# Altium PCB FPGA.PcbDoc (part 2 of 2)
Units mil, origin at the board's own origin, x right, y up, seen from the top; angles counter-clockwise.
Board outline 3947.01 x 3159.61 mil, 4 copper layers (Top Layer, Top, Mid-Layer 1, GND, Mid-Layer 2, VCC, Bottom Layer, Bottom), stack 18.2 mil thick; 141 components, 123 nets, 692 pads, 263 vias.
Unrouted connection lines stored in the file: 24.
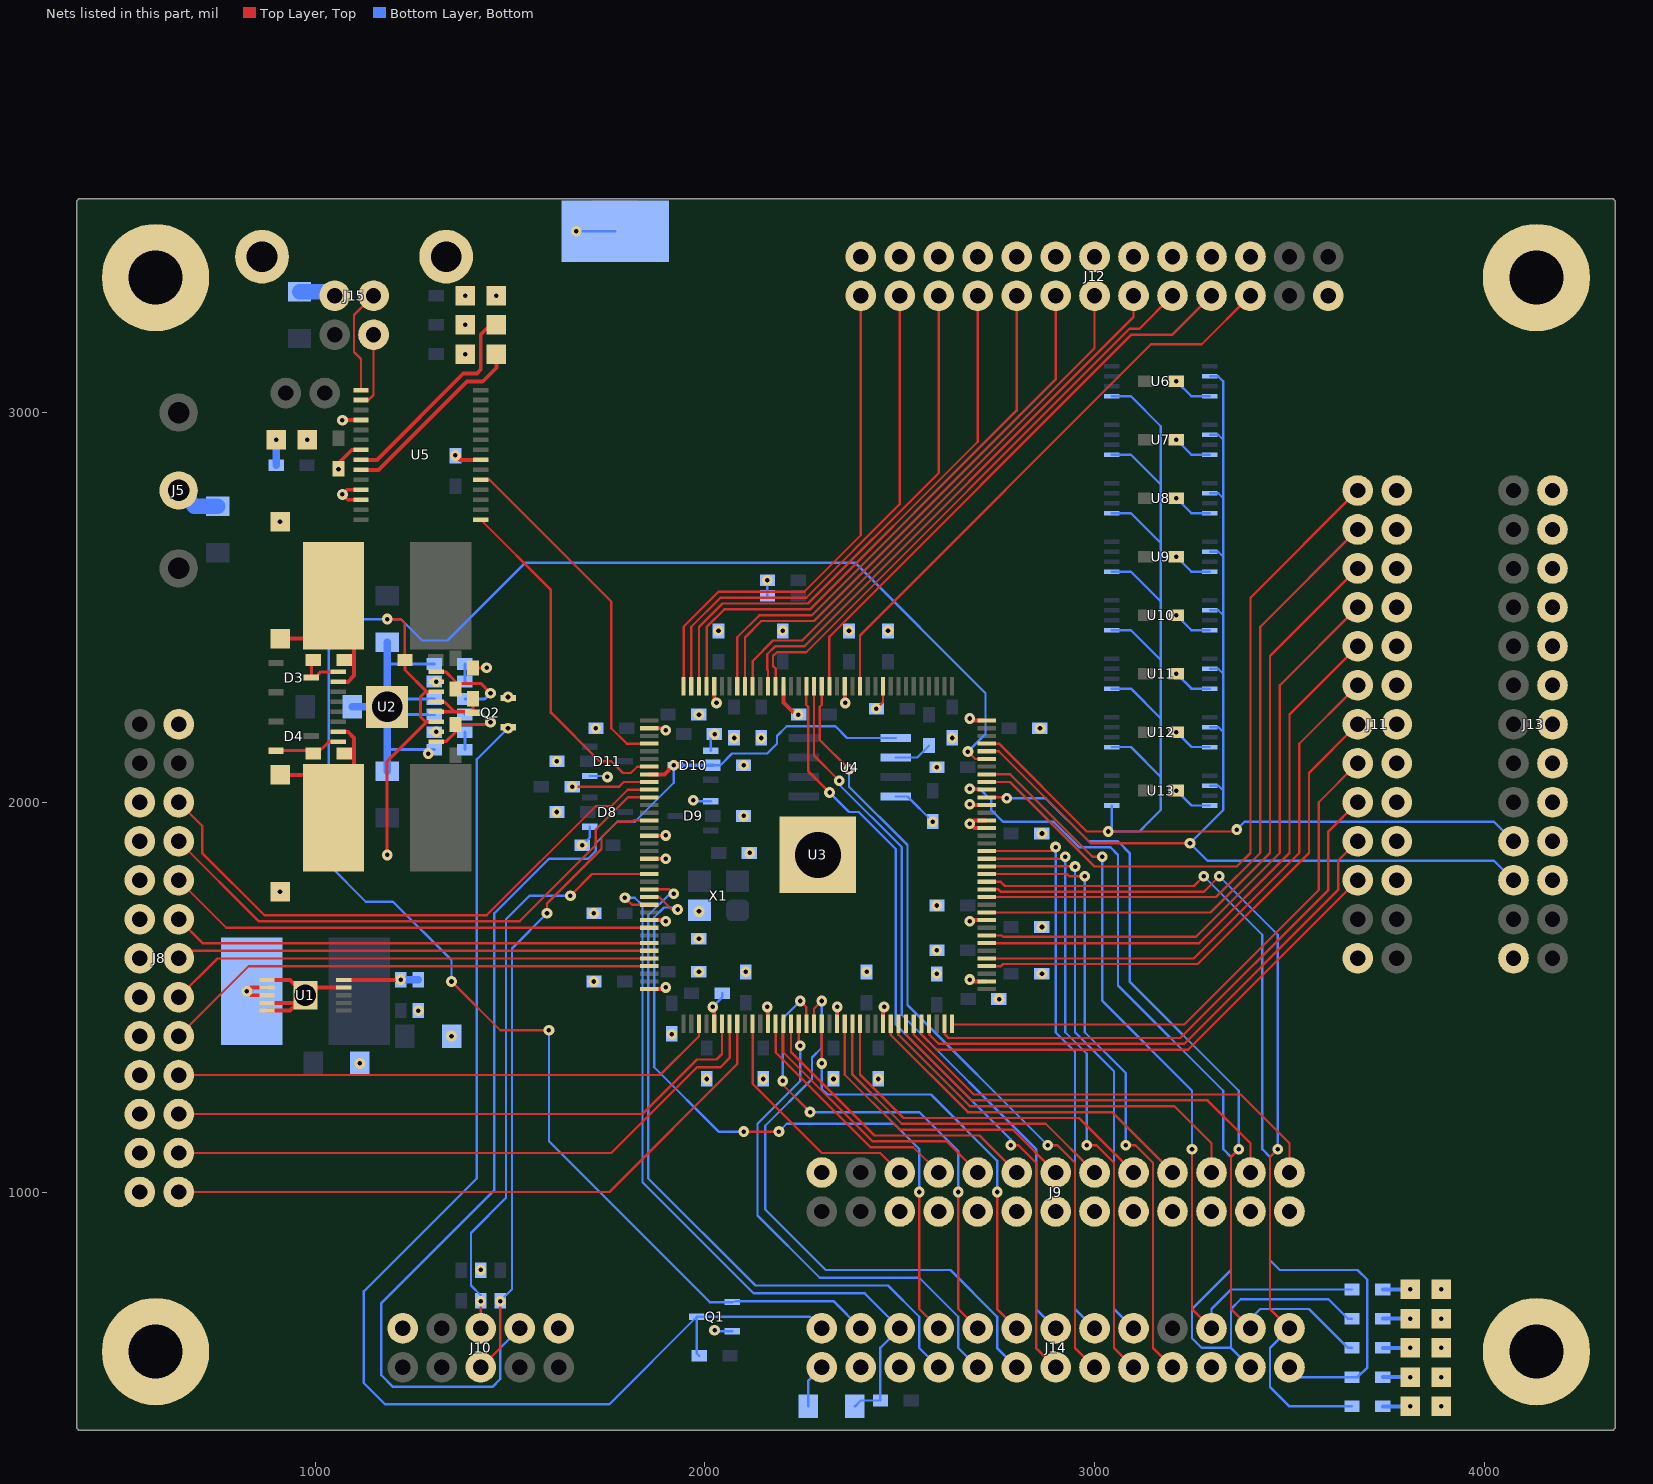
[diagram p4: the nets of this part, all layers, seen from the top]

## Via types
v1: diameter 27.56, hole 11.81, Top Layer, Top to Bottom Layer, Bottom, 263 vias

## Nets (pads, with @x,y where several pads share a name; then routed paths per layer and width w, separated by ;. In a path a pad name is that pad's centre, name@x,y a point inside that pad or via, vN(x,y) a via of type N, cw(c..) or ccw(c..) an arc to the next point about the centre after c; other vN are vias at no path point) (continued)
EEPROM_SI: J13.8 U3.105 U6.5 U7.5 U8.5 U9.5 U10.5 U11.5 U12.5 U13.5 | length 3793.5
  Top Layer, Top w5.98: U3.105@2723.07,2150.43 2754.57,2150.43 2980,1925 v1(3035,1925) 3360,1925 v1(3365,1930)
  Bottom Layer, Bottom w5.98: U13.5@3044.02,1991.61 3044.02,1934.02 v1(3035,1925) 3115,1925 3140,1950 3170,1980 3170,2065 ; U12.5@3044.02,2141.61 3093.39,2141.61 3170,2065 ; U11.5@3044.02,2291.61 3093.39,2291.61 3170,2215 ; U10.5@3044.02,2441.61 3093.39,2441.61 3170,2365 ; U9.5@3044.02,2591.61 3093.39,2591.61 3170,2515 ; U8.5@3044.02,2741.61 3093.39,2741.61 3170,2665 ; U7.5@3044.02,2891.61 3093.39,2891.61 3170,2815 ; U6.5@3044.02,3041.61 3093.39,3041.61 3170,2965 3170,2815 ; v1(3365,1930) 3385,1950 4025,1950 J13.8@4075,1900 ; 3170,2065 3170,2215 ; 3170,2215 3170,2365 ; 3170,2365 3170,2515 ; 3170,2515 3170,2665 ; 3170,2665 3170,2815
EEPROM_SO: J13.6 U3.104 U6.2 U7.2 U8.2 U9.2 U10.2 U11.2 U12.2 U13.2 | length 3023.7
  Top Layer, Top w5.98: U3.104@2723.07,2130.75 2754.25,2130.75 2990,1895 v1(3245,1895)
  Bottom Layer, Bottom w5.98: U13.2@3295.98,2042.8 3317.2,2042.8 3330,2030 ; U12.2@3295.98,2192.8 3317.2,2192.8 3330,2180 ; U11.2@3295.98,2342.8 3317.2,2342.8 3330,2330 ; U10.2@3295.98,2492.8 3317.2,2492.8 3330,2480 ; U9.2@3295.98,2642.8 3317.2,2642.8 3330,2630 ; U8.2@3295.98,2792.8 3317.2,2792.8 3330,2780 ; U7.2@3295.98,2942.8 3317.2,2942.8 3330,2930 ; U6.2@3295.98,3092.8 3317.2,3092.8 3330,3080 3330,2930 ; J13.6@4075,1800 4025,1850 3290,1850 v1(3245,1895) 3330,1980 3330,2030 ; 3330,2030 3330,2180 ; 3330,2180 3330,2330 ; 3330,2330 3330,2480 ; 3330,2480 3330,2630 ; 3330,2630 3330,2780 ; 3330,2780 3330,2930
GND: C1.2 C2.2 C3.2 C4.2 C6.2 C7.2 C8.2 C9.2 C10.2 C12.2 C13.1 C14.1 C15.1 C16.1 C17.1 C18.1 C19.1 C20.1 C21.1 C22.1 C23.1 C24.1 C25.1 C26.1 C27.1 C28.1 C29.1 C30.1 C31.1 C32.1 C33.1 C34.1 C35.1 C36.1 C37.1 C38.1 C39.1 C40.2 C41.2 C42.2 C43.2 C44.2 C45.2 C46.2 C47.2 C48.2 C49.2 C50.2 C51.2 C52.2 C53.2 C54.2 C55.2 C56.1 C57.1 C58.1 C59.1 C60.1 C61.1 C62.1 C63.1 D1.2 D2.1 D5.1 D6.2 D7.2 D8.1 D9.1 D10.1 D11.1 D12.2 D13.2 D14.2 D17.2 J1.1 J2.1 J3.1 J4.1 J5.2 J7.2 J8.2 J8.5 J8.7 J8.9 J8.11 J8.13 J8.15 J8.17 J8.19 J8.21 J8.23 J8.25 J9.2 J9.5 J9.7 J9.9 J9.11 J9.13 J9.15 J9.17 J9.19 J9.21 J9.23 J9.25 J10.2 J10.10 J11.2 J11.5 J11.7 J11.9 J11.11 J11.13 J11.15 J11.17 J11.19 J11.21 J11.23 J11.25 J12.2 J12.5 J12.7 J12.9 J12.11 J12.13 J12.15 J12.17 J12.19 J12.21 J12.23 J12.25 J13.2 J13.5 J13.7 J13.9 J13.11 J13.13 J13.15 J13.17 J13.19 J13.21 J13.23 J13.25 J14.1 J14.3 J14.5 J14.21 J15.4 J15.5 J15.6 Q1.2 Q2.2 R5.2 R8.2 R11.2 R16.1 R17.2 R18.2 U1.4 U1.6 U1.9 U1.10 U1.11 U2.17 U3.2 U3.16 U3.19 U3.27 U3.36 U3.41 U3.48 U3.57 U3.63 U3.74 U3.82 U3.94 U3.95 U3.97 U3.108 U3.118 U3.123 U3.131 U3.140 U3.145 U4.4 U5.7 U5.18 U5.21 U5.25 U5.26 U6.4 U7.4 U8.4 U9.4 U10.4 U11.4 U12.4 U13.4 X1.2 | length 4396.3
  Top Layer, Top w5.98: v1(2440,2240) 2457.32,2257.32 U3.118@2457.32,2298.07 ; C63.1@3209.37,2030 v1(3210,2030) ; C62.1@3209.37,2180 v1(3210,2180) ; C61.1@3209.37,2330 v1(3210,2330) ; C60.1@3209.37,2480 v1(3210,2480) ; C59.1@3209.37,2630 v1(3210,2630) ; C58.1@3209.37,2780 v1(3210,2780) ; C57.1@3209.37,2930 v1(3210,2930) ; C56.1@3209.37,3080 v1(3210,3080)
  Top Layer, Top w7.87: C9.2@1405,2344.37 1439.37,2344.37 v1(1440,2345) ; v1(1495,2270) 1495,2267.97 Q2.2@1495.47,2267.5
  Top Layer, Top w9.84: U1.10@876.57,1465.63 935.63,1465.63 U1.11@955.32,1485.32 ; U1.9@876.57,1485.32 U1.11@955.32,1485.32 ; U1.6@876.57,1544.37 935.63,1544.37 U1.11@975,1505 ; v1(1060,2855) C54.2@1060,2855.63 1060,2870 1094.13,2904.13 U5.21@1117.91,2904.13 ; v1(1070,2980) 1070.91,2980.91 U5.18@1117.91,2980.91 ; U1.4@1073.43,1524.68 994.68,1524.68 U1.11@975,1505 ; U5.26@1117.91,2776.18 1083.82,2776.18 v1(1070,2790) 1081.77,2801.77 U5.25@1117.91,2801.77 ; U5.7@1425,2878.54 1371.46,2878.54 ; U3.36@1856.93,1520.51 1895.51,1520.51 v1(1900,1525) ; U3.27@1856.93,1697.68 1897.32,1697.68 v1(1900,1695) ; U3.19@1856.93,1855.16 1899.84,1855.16 v1(1900,1855) ; U3.16@1856.93,1914.21 1899.21,1914.21 v1(1900,1915) ; U3.2@1856.93,2189.8 1895.2,2189.8 v1(1900,2185) ; v1(2020,1475) 2024.25,1470.75 U3.41@2024.25,1431.93 ; U3.140@2024.25,2298.07 2024.25,2260.75 v1(2030,2255) ; v1(2160,1475) 2162.05,1472.95 U3.48@2162.05,1431.93 ; U3.131@2201.42,2298.07 2201.42,2256.42 2232.83,2225 v1(2240,2225) ; U3.57@2339.21,1431.93 2339.21,1474.21 v1(2340,1475) ; U3.123@2358.9,2298.07 2358.9,2256.1 v1(2360,2255) ; U3.63@2457.32,1431.93 2457.32,1472.32 v1(2460,1475) ; v1(2680,1545) 2684.8,1540.2 U3.74@2723.07,1540.2 ; v1(2680,1695) 2682.68,1697.68 U3.82@2723.07,1697.68 ; v1(2680,1995) 2682.05,1992.95 U3.97@2723.07,1992.95 ; v1(2680,2215) 2685.51,2209.49 U3.108@2723.07,2209.49 ; U3.94@2723.07,1933.9 2691.1,1933.9 v1(2680,1945) 2688.58,1953.58 U3.95@2723.07,1953.58 ; U1.11@955.32,1485.32 U1.11@975,1505 ; 1371.46,2878.54 v1(1360,2890) 1371.46,2878.54
  Bottom Layer, Bottom w5.98: R16.1@1425,799.37 v1(1425,800) ; v1(1620,1975) C49.2@1620.63,1975 ; v1(1620,2105) C52.2@1620.63,2105 ; v1(1670,3465) J7.2@1770,3465 ; C25.1@1685.63,1890 v1(1685,1890) 1704.53,1909.53 D8.1@1704.53,1937.5 ; D11.1@1704.53,2067.5 1747.5,2067.5 v1(1750,2065) ; v1(1715,1540) C40.2@1715.63,1540 ; v1(1715,1715) C24.1@1715.63,1715 ; v1(1720,2190) C42.2@1720.63,2190 ; v1(1915,1405) C44.2@1915,1405.63 ; v1(1970,2005) 1972.5,2002.5 D9.1@2015.47,2002.5 ; C28.1@1984.37,1565 v1(1985,1565) ; C27.1@1984.37,1650 v1(1985,1650) ; C46.2@1984.37,2225 v1(1985,2225) ; v1(2005,1290) C23.1@2005,1290.63 ; D10.1@2015.47,2132.5 2015.47,2165.47 v1(2025,2175) C26.1@2024.37,2175 ; v1(2020,1475) 2044.37,1499.37 C29.1@2044.37,1510 ; v1(2025,645) 2027.5,642.5 Q1.2@2070.47,642.5 ; C17.1@2035,2439.37 v1(2035,2440) ; v1(2075,2165) C39.1@2075,2165.63 ; C30.1@2105,1564.37 v1(2105,1565) ; v1(2145,2165) C38.1@2145,2165.63 ; v1(2150,1290) C22.1@2150,1290.63 ; v1(2160,2570) R18.2@2160,2565 ; R17.2@2160.63,2530 2160,2530.63 R18.2@2160,2565 ; R18.2@2160.63,2570 R18.2@2160,2565 ; C16.1@2200,2439.37 v1(2200,2440) ; v1(2240,2225) C37.1@2240.63,2225 ; C2.2@2265,450 2265,515 J14.1@2300,550 ; v1(2330,1290) C18.1@2330,1290.63 ; C15.1@2370,2439.37 v1(2370,2440) ; C31.1@2415,1564.37 v1(2415,1565) ; v1(2440,2240) C36.1@2440.63,2240 ; v1(2445,1290) C19.1@2445,1290.63 ; C14.1@2470,2439.37 v1(2470,2440) ; U4.4@2490,2015 2520,2015 v1(2585,1950) C48.2@2585,1950.63 ; C32.1@2595,1559.37 v1(2595,1560) ; v1(2595,1620) C33.1@2595.63,1620 ; v1(2595,1735) C34.1@2595.63,1735 ; v1(2595,2090) C35.1@2595.63,2090 ; v1(2635,2165) C47.2@2635,2165.63 ; C45.2@2754.37,1495 v1(2755,1495) ; C41.2@2859.37,2190 v1(2860,2190) ; C43.2@2864.37,1560 v1(2865,1560) ; C20.1@2864.37,1680 v1(2865,1680) ; C21.1@2864.37,1920 v1(2865,1920) ; v1(3210,2030) 3248.39,1991.61 U13.4@3295.98,1991.61 ; v1(3210,2180) 3248.39,2141.61 U12.4@3295.98,2141.61 ; v1(3210,2330) 3248.39,2291.61 U11.4@3295.98,2291.61 ; v1(3210,2480) 3248.39,2441.61 U10.4@3295.98,2441.61 ; v1(3210,2630) 3248.39,2591.61 U9.4@3295.98,2591.61 ; v1(3210,2780) 3248.39,2741.61 U8.4@3295.98,2741.61 ; v1(3210,2930) 3248.39,2891.61 U7.4@3295.98,2891.61 ; v1(3210,3080) 3248.39,3041.61 U6.4@3295.98,3041.61
  Bottom Layer, Bottom w7.87: U2.17@1140,2225 1185,2225 R11.2@1305.63,2225 ; 1185,2135 C10.2@1300,2135 ; U2.17@1185,2245 1205,2265 R5.2@1305.63,2265 ; 1185,2355 C6.2@1305.63,2355 ; v1(1290,2125) C10.2@1300,2135 ; C10.2@1305.63,2135 C10.2@1300,2135
  Bottom Layer, Bottom w9.84: v1(1265,1465) R8.2@1265,1465.63 ; C55.2@1360,2889.37 v1(1360,2890) ; v1(1985,1720) 1985,1721.81 X1.2@1985.79,1722.6 ; C50.2@2099.37,1965 v1(2100,1965) ; C51.2@2099.37,2095 v1(2100,2095) ; C13.1@2114.37,1870 v1(2115,1870)
  Bottom Layer, Bottom w19.68: C7.2@1095,2245 U2.17@1185,2245 ; C12.2@1185,2080 1185,2135 1185,2225 U2.17@1185,2245 ; C3.2@1185,2410 1185,2355 U2.17@1185,2245
  Bottom Layer, Bottom w39.37: J5.2@650,2800 690,2760 C1.2@750,2760 ; C53.2@960,3310 1040,3310 J15.4@1050,3300
  other v1: 3890,450 3890,525 3890,600 3890,675 3890,750 1115,1330 1350,1400 910,1770 910,2720 980,2930 1465,3300
IN_00: J14.7 U3.23 | length 1823.3
  Top Layer, Top w5.98: U3.23@1856.93,1776.42 1908.58,1776.42 v1(1920,1765)
  Bottom Layer, Bottom w5.98: v1(1920,1765) 1910,1765 1855,1710 1855,1035 2130,760 2470,760 2550,680 2550,600 J14.7@2600,550
IN_01: J14.8 U3.24 | length 1807.9
  Top Layer, Top w5.98: U3.24@1856.93,1756.73 1883.27,1756.73 1915,1725 v1(1930,1725) ; v1(2100,1155) v1(2190,1155) ; v1(2550,1000) 2550,700 J14.8@2600,650
  Bottom Layer, Bottom w5.98: v1(1930,1725) 1925,1730 1895,1730 1870,1705 1870,1320 2035,1155 v1(2100,1155) ; v1(2190,1155) 2210,1175 2485,1175 2550,1110 v1(2550,1000)
IN_02: J14.9 U3.52 | length 1312.6
  Top Layer, Top w5.98: U3.52@2240.79,1431.93 2240.79,1379.21 v1(2245,1375)
  Bottom Layer, Bottom w5.98: v1(2245,1375) 2245,1285 2135,1175 2135,940 2295,780 2550,780 2650,680 2650,600 J14.9@2700,550
IN_03: J14.10 U3.53 | length 1294.2
  Top Layer, Top w5.98: v1(2200,1285) 2200,1275 v1(2270,1205) ; v1(2245,1490) 2260.47,1474.53 U3.53@2260.47,1431.93 ; v1(2650,1000) 2650,700 J14.10@2700,650
  Bottom Layer, Bottom w5.98: v1(2200,1285) 2200,1445 v1(2245,1490) ; v1(2270,1205) 2550,1205 2650,1105 v1(2650,1000)
IN_04: J14.11 U3.54 | length 1521
  Top Layer, Top w5.98: U3.54@2280.16,1431.93 2280.16,1470.16 v1(2300,1490)
  Bottom Layer, Bottom w5.98: v1(2300,1490) 2300,1370 2275,1345 2275,1290 2155,1170 2155,955 2310,800 2630,800 2750,680 2750,600 J14.11@2800,550
IN_05: J14.12 U3.55 | length 1144.3
  Top Layer, Top w5.98: U3.55@2299.84,1431.93 2299.84,1330.16 v1(2300,1330) ; v1(2750,1000) 2750,700 J14.12@2800,650
  Bottom Layer, Bottom w5.98: v1(2300,1330) 2300,1265 2315,1250 2580,1250 2750,1080 v1(2750,1000)
IN_06: J14.13 U3.128 | length 2039.3
  Top Layer, Top w5.98: U3.128@2260.47,2298.07 2260.47,2249.53 2265,2245 2265,2080 v1(2320,2025) ; v1(2785,1120) 2805,1120 2850,1075 2850,600 J14.13@2900,550
  Bottom Layer, Bottom w5.98: v1(2320,2025) 2370,1975 2395,1975 2490,1880 2490,1430 2785,1135 v1(2785,1120)
IN_07: J14.14 U3.127 | length 1904.9
  Top Layer, Top w5.98: U3.127@2280.16,2298.07 2280.16,2190.16 2280,2190 2280,2120 v1(2345,2055)
  Bottom Layer, Bottom w5.98: v1(2345,2055) 2345,2045 2505,1885 2505,1455 2850,1110 2850,700 J14.14@2900,650
IN_08: J14.15 U3.126 | length 2056.7
  Top Layer, Top w5.98: U3.126@2299.84,2298.07 2299.84,2249.84 2295,2245 2295,2160 v1(2370,2085) ; v1(2880,1120) 2905,1120 2950,1075 2950,600 J14.15@3000,550
  Bottom Layer, Bottom w5.98: v1(2370,2085) 2370,2040 2520,1890 2520,1480 v1(2880,1120)
IN_09: J14.16 U3.91 | length 1457.6
  Top Layer, Top w5.98: U3.91@2723.07,1874.84 2838.07,1874.84 2889.84,1874.84 v1(2900,1885)
  Bottom Layer, Bottom w5.98: v1(2900,1885) 2900,1410 2950,1360 2950,700 J14.16@3000,650
IN_10: J14.17 U3.90 | length 1601.1
  Top Layer, Top w5.98: U3.90@2723.07,1855.16 2838.07,1855.16 2920.16,1855.16 v1(2925,1860) ; v1(2980,1120) 3005,1120 3050,1075 3050,600 J14.17@3100,550
  Bottom Layer, Bottom w5.98: v1(2925,1860) 2925,1410 2980,1355 v1(2980,1120)
IN_11: J14.18 U3.89 | length 1474.3
  Top Layer, Top w5.98: U3.89@2723.07,1835.47 2838.07,1835.47 2949.53,1835.47 v1(2950,1835)
  Bottom Layer, Bottom w5.98: v1(2950,1835) 2950,1410 3050,1310 3050,700 J14.18@3100,650
IN_12: J14.19 U3.88 | length 1622.2
  Top Layer, Top w5.98: U3.88@2723.07,1815.79 2838.07,1815.79 2929.21,1815.79 2935,1810 v1(2975,1810) ; v1(3080,1120) 3105,1120 3150,1075 3150,600 J14.19@3200,550
  Bottom Layer, Bottom w5.98: v1(2975,1810) 2975,1410 3080,1305 v1(3080,1120)
IO_A00: J8.6 U3.10 | length 1501.6
  Top Layer, Top w5.98: J8.6@650,2000 710,1940 710,1870 870,1710 1440,1710 1720,1990 1760,1990 1802.32,2032.32 U3.10@1856.93,2032.32
IO_A01: J8.8 U3.11 | length 1446.8
  Top Layer, Top w5.98: J8.8@650,1900 855,1695 1525,1695 1720,1890 1720,1930 1765,1975 1802.64,2012.64 U3.11@1856.93,2012.64
IO_A02: J8.10 U3.28 | length 1257.5
  Top Layer, Top w5.98: J8.10@650,1800 772.01,1677.99 U3.28@1856.93,1677.99
IO_A03: J8.12 U3.30 | length 1232.4
  Top Layer, Top w5.98: J8.12@650,1700 711.38,1638.62 U3.30@1856.93,1638.62
IO_A04: J8.14 U3.31 | length 1214.8
  Top Layer, Top w5.98: J8.14@650,1600 668.94,1618.94 U3.31@1856.93,1618.94
IO_A05: J8.16 U3.32 | length 1248
  Top Layer, Top w5.98: J8.16@650,1500 749.25,1599.25 U3.32@1856.93,1599.25
IO_A06: J8.18 U3.33 | length 1281.3
  Top Layer, Top w5.98: J8.18@650,1400 829.57,1579.57 U3.33@1856.93,1579.57
IO_A07: J8.20 U3.39 | length 1408.3
  Top Layer, Top w5.98: J8.20@650,1300 1885,1300 1984.88,1399.88 U3.39@1984.88,1431.93
IO_A08: J8.22 U3.42 | length 1535.7
  Top Layer, Top w5.98: J8.22@650,1200 1840,1200 1980,1340 2030,1340 2043.94,1353.94 U3.42@2043.94,1431.93
IO_A09: J8.24 U3.43 | length 1602.8
  Top Layer, Top w5.98: J8.24@650,1100 1760,1100 1980,1320 2040,1320 2063.62,1343.62 U3.43@2063.62,1431.93
IO_A10: J8.26 U3.44 | length 1672.9
  Top Layer, Top w5.98: J8.26@650,1000 1755,1000 2083.31,1328.31 U3.44@2083.31,1431.93
IO_B00: J9.6 U3.46 | length 626.1
  Top Layer, Top w5.98: U3.46@2122.68,1431.93 2122.68,1277.32 2300,1100 2450,1100 J9.6@2500,1050
IO_B01: J9.8 U3.49 | length 619.6
  Top Layer, Top w5.98: U3.49@2181.73,1431.93 2181.73,1358.27 2425,1115 2535,1115 J9.8@2600,1050
IO_B02: J9.10 U3.50 | length 699.7
  Top Layer, Top w5.98: U3.50@2201.42,1431.93 2201.42,1358.58 2430,1130 2620,1130 J9.10@2700,1050
IO_B03: J9.12 U3.51 | length 779.9
  Top Layer, Top w5.98: U3.51@2221.1,1431.93 2221.1,1358.9 2435,1145 2705,1145 J9.12@2800,1050
IO_B04: J9.14 U3.58 | length 775.9
  Top Layer, Top w5.98: U3.58@2358.9,1431.93 2358.9,1301.1 2500,1160 2790,1160 J9.14@2900,1050
IO_B05: J9.16 U3.59 | length 856.1
  Top Layer, Top w5.98: U3.59@2378.58,1431.93 2378.58,1301.42 2505,1175 2875,1175 J9.16@3000,1050
IO_B06: J9.18 U3.60 | length 936.2
  Top Layer, Top w5.98: U3.60@2398.27,1431.93 2398.27,1301.73 2510,1190 2960,1190 J9.18@3100,1050
IO_B07: J9.20 U3.64 | length 898.1
  Top Layer, Top w5.98: U3.64@2477.01,1431.93 2477.01,1402.99 2675,1205 3045,1205 J9.20@3200,1050
IO_B08: J9.22 U3.65 | length 1022.2
  Top Layer, Top w5.98: U3.65@2496.69,1431.93 2496.69,1403.31 2680,1220 3205,1220 3300,1125 J9.22@3300,1050
IO_B09: J9.24 U3.66 | length 1102.3
  Top Layer, Top w5.98: U3.66@2516.38,1431.93 2516.38,1403.62 2685,1235 3290,1235 3400,1125 J9.24@3400,1050
IO_B10: J9.26 U3.67 | length 1182.5
  Top Layer, Top w5.98: U3.67@2536.06,1431.93 2536.06,1403.94 2690,1250 3375,1250 3500,1125 J9.26@3500,1050
IO_C00: J11.6 U3.68 | length 1343.4
  Top Layer, Top w5.98: U3.68@2555.75,1431.93 2555.75,1404.25 2595,1365 3240,1365 J11.6@3675,1800
IO_C01: J11.8 U3.69 | length 1396.4
  Top Layer, Top w5.98: U3.69@2575.43,1431.93 2575.43,1404.57 2600,1380 3230,1380 3625,1775 3625,1850 J11.8@3675,1900
IO_C02: J11.10 U3.71 | length 1429.6
  Top Layer, Top w5.98: U3.71@2614.8,1431.93 2614.8,1405.2 2625,1395 3220,1395 3600,1775 3600,1925 J11.10@3675,2000
IO_C03: J11.12 U3.72 | length 1450.6
  Top Layer, Top w5.98: U3.72@2634.49,1431.93 2636.42,1430 3230,1430 3575,1775 3575,2000 J11.12@3675,2100
IO_C04: J11.14 U3.76 | length 1329
  Top Layer, Top w5.98: U3.76@2723.07,1579.57 2759.57,1579.57 2765,1585 3265,1585 3550,1870 3550,2075 J11.14@3675,2200
IO_C05: J11.16 U3.77 | length 1406.2
  Top Layer, Top w5.98: U3.77@2723.07,1599.25 3254.25,1599.25 3525,1870 3525,2150 J11.16@3675,2300
IO_C06: J11.18 U3.79 | length 1475.3
  Top Layer, Top w5.98: U3.79@2723.07,1638.62 3268.62,1638.62 3500,1870 3500,2225 J11.18@3675,2400
IO_C07: J11.20 U3.80 | length 1555.2
  Top Layer, Top w5.98: U3.80@2723.07,1658.31 2761.69,1658.31 2765,1655 3260,1655 3475,1870 3475,2300 J11.20@3675,2500
IO_C08: J11.22 U3.83 | length 1613.4
  Top Layer, Top w5.98: U3.83@2723.07,1717.36 3297.36,1717.36 3450,1870 3450,2375 J11.22@3675,2600
IO_C09: J11.24 U3.85 | length 1682.4
  Top Layer, Top w5.98: U3.85@2723.07,1756.73 3311.73,1756.73 3425,1870 3425,2450 J11.24@3675,2700
IO_C10: J11.26 U3.100 | length 1825.2
  Top Layer, Top w5.98: U3.100@2723.07,2052.01 2782.99,2052.01 3000,1835 3365,1835 3400,1870 3400,2525 J11.26@3675,2800
IO_D00: J12.6 U3.121 | length 1493
  Top Layer, Top w5.98: U3.121@2398.27,2298.07 2398.27,2428.27 3145,3175 3275,3175 J12.6@3400,3300
IO_D01: J12.8 U3.125 | length 1469.6
  Top Layer, Top w5.98: U3.125@2319.53,2298.07 2319.53,2424.53 3095,3200 3200,3200 J12.8@3300,3300
IO_D02: J12.10 U3.132 | length 1487.9
  Top Layer, Top w5.98: U3.132@2181.73,2298.07 2181.73,2343.27 2175,2350 2175,2375 2185,2385 2260,2385 3090,3215 3115,3215 J12.10@3200,3300
IO_D03: J12.12 U3.133 | length 1436.1
  Top Layer, Top w5.98: U3.133@2162.05,2298.07 2162.05,2337.95 2160,2340 2160,2380 2180,2400 2255,2400 3100,3245 J12.12@3100,3300
IO_D04: J12.14 U3.135 | length 1409.3
  Top Layer, Top w5.98: U3.135@2122.68,2298.07 2122.68,2362.68 2175,2415 2250,2415 3000,3165 J12.14@3000,3300
IO_D05: J12.16 U3.136 | length 1411.1
  Top Layer, Top w5.98: U3.136@2102.99,2298.07 2102.99,2422.99 2145,2465 2280,2465 2900,3085 J12.16@2900,3300
IO_D06: J12.18 U3.137 | length 1377.9
  Top Layer, Top w5.98: U3.137@2083.31,2298.07 2083.31,2423.31 2140,2480 2275,2480 2800,3005 J12.18@2800,3300
IO_D07: J12.20 U3.141 | length 1418.9
  Top Layer, Top w5.98: U3.141@2004.57,2298.07 2004.57,2449.57 2050,2495 2270,2495 2700,2925 J12.20@2700,3300
IO_D08: J12.22 U3.142 | length 1385.6
  Top Layer, Top w5.98: U3.142@1984.88,2298.07 1984.88,2449.88 2045,2510 2265,2510 2600,2845 J12.22@2600,3300
IO_D09: J12.24 U3.143 | length 1352.3
  Top Layer, Top w5.98: U3.143@1965.2,2298.07 1965.2,2450.2 2040,2525 2260,2525 2500,2765 J12.24@2500,3300
IO_D10: J12.26 U3.144 | length 1319.1
  Top Layer, Top w5.98: U3.144@1945.51,2298.07 1945.51,2450.51 2035,2540 2255,2540 2400,2685 J12.26@2400,3300
LED_0: J14.22 R20.2 U3.101 | length 2141.9
  Top Layer, Top w5.98: U3.101@2723.07,2071.69 2783.31,2071.69 2995,1860 v1(3020,1860) ; v1(3250,1110) 3250,700 J14.22@3300,650
  Bottom Layer, Bottom w5.98: v1(3020,1860) 3020,1490 3250,1260 v1(3250,1110) ; J14.22@3300,650 3300,700 3350,750 R20.2@3660.63,750
LED_1: J14.23 R21.2 U3.99 | length 2533.5
  Top Layer, Top w5.98: v1(2680,2035) 2682.68,2032.32 U3.99@2723.07,2032.32
  Bottom Layer, Bottom w5.98: v1(2680,2035) 2705,2035 2735,2005 2735,1980 2765,1950 2895,1950 2955,1890 2960,1885 3040,1885 3060,1865 3060,1530 3330,1260 3330,1110 3350,1090 3350,800 3250,700 3250,625 3275,600 3350,600 ; J14.23@3400,550 3350,600 ; R21.2@3660.63,675 3650,675 3600,725 3375,725 3350,700 3350,600
LED_2: J14.24 R22.2 U3.98 | length 2128.4
  Top Layer, Top w5.98: U3.98@2723.07,2012.64 2772.36,2012.64 v1(2775,2010) ; v1(3370,1110) 3350,1090 3350,700 J14.24@3400,650
  Bottom Layer, Bottom w5.98: v1(2775,2010) 2845,2010 2875,2010 2985,1900 3060,1900 3090,1870 3090,1540 3370,1260 v1(3370,1110) ; J14.24@3400,650 3400,675 3425,700 3550,700 3650,600 R22.2@3660.63,600
LED_3: J14.25 R23.2 U3.87 | length 2354.4
  Top Layer, Top w5.98: U3.87@2723.07,1796.1 2758.9,1796.1 2770,1785 3255,1785 v1(3280,1810)
  Bottom Layer, Bottom w5.98: v1(3280,1810) 3430,1660 3430,1110 3450,1090 3450,825 3475,800 3675,800 3700,775 3700,550 3675,525 R23.2@3660.63,525 ; J14.25@3500,550 3525,525 R23.2@3650,525 ; R23.2@3650,525 R23.2@3660.63,525 ; R23.2@3650,525 R23.2@3660.63,525
LED_4: J14.26 R24.2 U3.86 | length 2269.3
  Top Layer, Top w5.98: U3.86@2723.07,1776.42 2753.58,1776.42 2760,1770 3280,1770 v1(3320,1810) ; v1(3470,1110) 3450,1090 3450,700 J14.26@3500,650
  Bottom Layer, Bottom w5.98: v1(3320,1810) 3470,1660 v1(3470,1110) ; J14.26@3500,650 3450,600 3450,500 3500,450 R24.2@3660.63,450
N_CE: J10.6 R16.2 U3.21 | length 1512.5
  Top Layer, Top w5.98: J10.6@1425,650 v1(1425,720) ; v1(1655,1760) 1710.79,1815.79 U3.21@1856.93,1815.79
  Bottom Layer, Bottom w5.98: v1(1425,720) R16.2@1425,720.63 1425,735 1400,760 1400,895 1490,985 1490,1700 1550,1760 v1(1655,1760)
N_CONFIG: J10.5 R15.2 U3.14 | length 1628.4
  Top Layer, Top w5.98: J10.5@1425,550 1475,600 v1(1475,720) ; v1(1595,1715) 1595,1740 1735,1880 1735,1910 1775,1950 1815,1950 1818.58,1953.58 U3.14@1856.93,1953.58
  Bottom Layer, Bottom w5.98: v1(1475,720) R15.2@1475,720.63 1505,750.63 1505,1625 v1(1595,1715)
N_CS: C51.1 D10.3 J10.8 U3.8 U4.1 | length 3145.3
  Top Layer, Top w9.84: U3.8@1856.93,2071.69 1896.69,2071.69 v1(1920,2095)
  Bottom Layer, Bottom w5.98: J10.8@1525,650 1475,600 1475,520 1455,500 1200,500 1170,530 1170,715 1460,1005 1460,1715 1600,1855 1700,1855 1720,1875 1720,1895 1775,1950 1820,1950 1920,2050 v1(1920,2095) ; C51.1@2020.63,2095 2040,2095 2070,2125 2160,2125 2185,2150 2185,2170 2210,2195 2335,2195 2365,2165 U4.1@2490,2165
  Bottom Layer, Bottom w9.84: v1(1920,2095) D10.3@1924.47,2095 C51.1@2020.63,2095
N_ON: J14.2 Q1.3 Q2.1 R1.2 | length 3242.1
  Top Layer, Top w5.98: v1(1495,2190) Q2.1@1495.47,2192.5
  Bottom Layer, Bottom w5.98: v1(1495,2190) 1415,2110 1415,1035 1125,745 1125,510 1180,455 1754.47,455 Q1.3@1979.47,680 ; R1.2@1985.63,580 1985,580 1979.47,585.53 Q1.3@1979.47,680 ; J14.2@2300,650 2270,680 Q1.3@1979.47,680
N_RESET: C2.1 J14.6 R2.2 U3.25 | length 1925.5
  Top Layer, Top w5.98: v1(1795,1755) 1812.95,1737.05 U3.25@1856.93,1737.05
  Bottom Layer, Bottom w5.98: v1(1795,1755) 1820,1755 1840,1735 1840,1025 2125,740 2410,740 J14.6@2500,650 2450,600 R2.2@2450,465 ; C2.1@2385,450 2400,465 R2.2@2450,465 ; R2.2@2450.63,465 R2.2@2450,465
N_STATUS: R13.2 U3.9 | length 202.5
  Top Layer, Top w5.98: v1(1660,2040) 1780,2040 1792.01,2052.01 U3.9@1856.93,2052.01
  Bottom Layer, Bottom w5.98: R13.2@1659.37,2040 v1(1660,2040)
NET00001: D15.1 R25.1 | length 4.4
  Bottom Layer, Bottom w9.84: v1(1385,3150) R25.1@1389.37,3150
NET00002: D15.2 U5.23 | length 490.6
  Top Layer, Top w9.84: U5.23@1117.91,2852.95 1162.95,2852.95 1390,3080 1430,3080 1465,3115 D15.2@1465,3150
NET00003: D16.1 R26.1 | length 4.4
  Bottom Layer, Bottom w9.84: v1(1385,3225) R26.1@1389.37,3225
NET00004: D16.2 U5.22 | length 543.3
  Top Layer, Top w9.84: U5.22@1117.91,2878.54 1158.54,2878.54 1380,3100 1415,3100 1425,3110 1425,3200 1450,3225 D16.2@1465,3225
NET00005: J15.3 U5.15 | length 270.5
  Top Layer, Top w5.98: U5.15@1117.91,3057.68 1117.91,3137.09 1100,3155 1100,3250 J15.3@1150,3300
NET00027: C11.1 D4.2 U2.8 | length 175.2
  Top Layer, Top w7.87: D4.2@899.53,2132.5 987.5,2132.5 995,2125 C11.1@995.63,2125 1005,2125 1035.43,2155.43 U2.8@1059.02,2155.43
NET00028: C11.2 D5.2 L3.1 U2.7 | length 479.8
  Top Layer, Top w7.87: C11.2@1074.37,2125 1100,2125
  Top Layer, Top w9.84: D5.2@910,2070 L3.1@1097.7,2070 ; L3.1@1047.2,1960 L3.1@1097.7,2070 ; U2.7@1059.02,2181.02 1083.98,2181.02 1100,2165 1100,2140 1100,2125 1100,2075 L3.1@1097.7,2070 ; L3.1@1100,2070 L3.1@1097.7,2070
NET00030: R11.1 R12.1 U2.9 | length 244.8
  Top Layer, Top w7.87: U2.9@1310.98,2155.43 1335.43,2155.43 1360,2180 R12.1@1360,2199.37 1444.37,2199.37 v1(1450,2205)
  Bottom Layer, Bottom w7.87: R11.1@1384.37,2225 1430,2225 v1(1450,2205)
NET00031: C10.1 R10.2 | length 45.3
  Bottom Layer, Bottom w7.87: C10.1@1384.37,2135 1384.37,2174.37 1385,2175 R10.2@1384.37,2180
NET00032: R10.1 U2.10 | length 5.5
  Bottom Layer, Bottom w7.87: R10.1@1305.63,2180 v1(1310.98,2181.02)
NET00033: C9.1 Q2.3 U2.12 U2.13 | length 188.5
  Top Layer, Top w7.87: U2.12@1310.98,2232.2 1357.8,2232.2 ; U2.13@1310.98,2257.8 1332.2,2257.8 1357.8,2232.2 ; Q2.3@1404.47,2230 Q2.3@1405,2230 ; C9.1@1405,2265.63 Q2.3@1405,2230 ; 1357.8,2232.2 1402.8,2232.2 Q2.3@1405,2230
NET00035: C6.1 R6.2 | length 45.3
  Bottom Layer, Bottom w7.87: R6.2@1384.37,2310 1384.37,2344.37 1385,2345 C6.1@1384.37,2355
NET00036: R6.1 U2.15 | length 5.5
  Bottom Layer, Bottom w7.87: R6.1@1305.63,2310 v1(1310.98,2308.98)
NET00037: R4.2 R5.1 U2.16 | length 256.7
  Top Layer, Top w7.87: U2.16@1310.98,2334.57 1335.43,2334.57 1360,2310 R4.2@1360,2290.63 1374.37,2305 1425,2305 v1(1450,2280)
  Bottom Layer, Bottom w7.87: R5.1@1384.37,2265 1435,2265 v1(1450,2280)
NET00038: C5.1 D2.2 L1.2 U2.2 | length 478.9
  Top Layer, Top w7.87: C5.1@1074.37,2365 1100,2365
  Top Layer, Top w9.84: D2.2@910,2420 L1.2@1093.66,2420 ; L1.2@1047.2,2530 L1.2@1093.66,2420 ; U2.2@1059.02,2308.98 1083.98,2308.98 1100,2325 1100,2350 1100,2365 1100,2405 L1.2@1093.66,2420 ; L1.2@1100,2420 L1.2@1093.66,2420
NET00040: C5.2 D3.3 U2.1 | length 122
  Top Layer, Top w7.87: C5.2@995.63,2365 995,2365 990.53,2360.53 D3.3@990.53,2320 1000,2320 1014.57,2334.57 U2.1@1059.02,2334.57
NET00045: D1.1 R3.2 | length 65.3
  Bottom Layer, Bottom w19.68: v1(900,2930) 900,2865.63 R3.2@900.63,2865
NET00046: L2.1 U1.7 U1.8 | length 123.5
  Top Layer, Top w9.84: U1.8@876.57,1505 835,1505 v1(825,1515) 834.68,1524.68 U1.7@876.57,1524.68
  Bottom Layer, Bottom w9.84: v1(825,1515) L2.1@837.2,1515
NET00047: R7.2 R8.1 U1.5 | length 193.4
  Top Layer, Top w9.84: U1.5@1073.43,1544.37 1219.37,1544.37 v1(1220,1545)
  Bottom Layer, Bottom w9.84: R7.2@1220,1544.37 v1(1220,1545)
  Bottom Layer, Bottom w19.68: R7.2@1220,1544.37 v1(1220,1545) 1264.37,1545 R8.1@1265,1544.37
NET00052: R19.1 U4.2 | length 98.1
  Bottom Layer, Bottom w5.98: U4.2@2490,2115 2545,2115 2575,2145 R19.1@2575,2145.63
NET00066: J15.2 U5.16 | length 192.4
  Top Layer, Top w5.98: U5.16@1117.91,3032.09 1137.09,3032.09 1150,3045 J15.2@1150,3200
NET00075: D17.1 R27.1 | length 4.4
  Bottom Layer, Bottom w9.84: v1(1385,3300) R27.1@1389.37,3300
NET00355: D13.1 R23.1 | length 70.6
  Bottom Layer, Bottom w9.84: R23.1@3739.37,525 v1(3810,525)
NET00357: D14.1 R24.1 | length 70.6
  Bottom Layer, Bottom w9.84: R24.1@3739.37,450 v1(3810,450)
NET00361: D6.1 R20.1 | length 70.6
  Bottom Layer, Bottom w9.84: R20.1@3739.37,750 v1(3810,750)
NET00363: D12.1 R22.1 | length 70.6
  Bottom Layer, Bottom w9.84: R22.1@3739.37,600 v1(3810,600)
NET00365: D7.1 R21.1 | length 70.6
  Bottom Layer, Bottom w9.84: R21.1@3739.37,675 v1(3810,675)
PW_OK: J14.4 Q1.1 R9.2 U2.11 U2.14 U3.103 | length 5596.3
  Top Layer, Top w5.98: v1(1185,2470) 1220,2470 1230,2460 R9.2@1230,2360 ; 1230,2345 R9.2@1230,2360 ; R9.2@1230.63,2365 R9.2@1230,2360 ; v1(1350,1540) 1475,1415 v1(1600,1415) ; v1(2675,2130) 2693.94,2111.06 U3.103@2723.07,2111.06
  Top Layer, Top w7.87: v1(1185,1865) 1185,2105 1286.61,2206.61 ; R9.2@1230.63,2365 1230.63,2339.37 1286.61,2283.39 ; U2.11@1310.98,2206.61 1286.61,2206.61 ; U2.14@1310.98,2283.39 1286.61,2283.39 ; 1286.61,2206.61 1283.39,2206.61 1270,2220 1270,2270 1283.39,2283.39 1286.61,2283.39
  Bottom Layer, Bottom w5.98: v1(1350,1540) 1350,1595 1200,1745 1130,1745 1035,1840 1035,2390 1115,2470 v1(1185,2470) 1220,2470 1275,2415 1340,2415 1540,2615 2385,2615 2720,2280 2720,2175 v1(2675,2130) ; v1(1600,1415) 1600,1130 2012.5,717.5 Q1.1@2070.47,717.5 2080,720 2330,720 J14.4@2400,650
USB_RX: U3.4 U5.5 | length 902.7
  Top Layer, Top w5.98: U5.5@1425,2827.36 1447.64,2827.36 1760,2515 1760,2190 1799.57,2150.43 U3.4@1856.93,2150.43
USB_TX: U3.7 U5.1 | length 892.5
  Top Layer, Top w5.98: U5.1@1425,2725 1605,2545 1605,2230 1730,2105 1760,2105 1790,2075 1810,2075 1826.38,2091.38 U3.7@1856.93,2091.38
pads on no net: D3.2 D4.1 U3.20 U5.2 U5.3 U5.6 U5.8 U5.9 U5.10 U5.11 U5.12 U5.13 U5.14 U5.24 U5.27 U5.28

## Polygon pours and split planes (outlines as drawn)
GND on Mid-Layer 1, GND (solid, remove dead copper, pour order 0): 433.07,452.76 438.84,438.84 452.76,433.07 4271.65,433.07 4285.57,438.84 4291.34,452.76 4291.34,3484.25 4285.57,3498.17 4271.65,3503.94 452.76,3503.94 438.84,3498.17 433.07,3484.25
3.3V on Mid-Layer 2, VCC (solid, remove dead copper, pour order 10): 3956.69,748.03 3970.61,753.8 3976.38,767.72 3976.38,3169.29 3970.61,3183.21 3956.69,3188.98 1358.27,3188.98 1344.35,3183.21 1338.58,3169.29 1338.58,3090.55 1332.82,3076.63 1318.9,3070.87 767.72,3070.87 753.8,3065.1 748.03,3051.18 748.03,767.72 753.8,753.8 767.72,748.03
12V on Mid-Layer 2, VCC (solid, remove dead copper, pour order 8): 4105.31,600 4119.23,605.77 4125,619.68 4125,3330.32 4119.23,3344.23 4105.31,3350 619.68,3350 605.77,3344.23 600,3330.32 600,619.68 605.77,605.77 619.68,600
-12V on Mid-Layer 2, VCC (solid, remove dead copper, pour order 6): 433.07,452.76 438.84,438.84 452.76,433.07 4271.65,433.07 4285.57,438.84 4291.34,452.76 4291.34,3484.25 4285.57,3498.17 4271.65,3503.94 452.76,3503.94 438.84,3498.17 433.07,3484.25
1.2V on Mid-Layer 2, VCC (solid, remove dead copper, pour order 4): 1890,1467.5 1892.5,1465 2687.5,1465 2690,1467.5 2690,2262.5 2687.5,2265 1892.5,2265 1890,2262.5
2.5V on Mid-Layer 2, VCC (solid, remove dead copper, pour order 2): 1825,1402.5 1827.5,1400 2752.5,1400 2755,1402.5 2755,2327.5 2752.5,2330 1827.5,2330 1825,2327.5

## Keep-outs
Keep-Out Layer, Board:
  lines w10: 393.7,393.7 4330.71,393.7 4330.71,3543.31 393.7,3543.31 393.7,393.7

## Silkscreen, mask and mechanical layers (free items; w line width, h text height)
Top Overlay, Top Silk:
  text "12V" at 419.78,2973.43 h24.61
  text "GND" at 412.4,2770.96 h24.61
  text "-12V" at 387.8,2573.43 h24.61

## Text inside footprints (layer, text, board x,y; h text height)
J8: Top Overlay, Top Silk "1" at 450,2275 h62.5
J9: Top Overlay, Top Silk "1" at 2225,850 h62.5 r90
J10: Top Overlay, Top Silk "1" at 1150,450 h62.5 r90
J11: Top Overlay, Top Silk "1" at 3875,1525 h62.5 r180
J12: Top Overlay, Top Silk "1" at 3675,3500 h62.5 r270
J13: Top Overlay, Top Silk "1" at 4275,1525 h62.5 r180
J14: Top Overlay, Top Silk "1" at 2225,450 h62.5 r90